# EAGLE board C64 ROM Selector - ATMega368 (EAGLE 9.6.1)
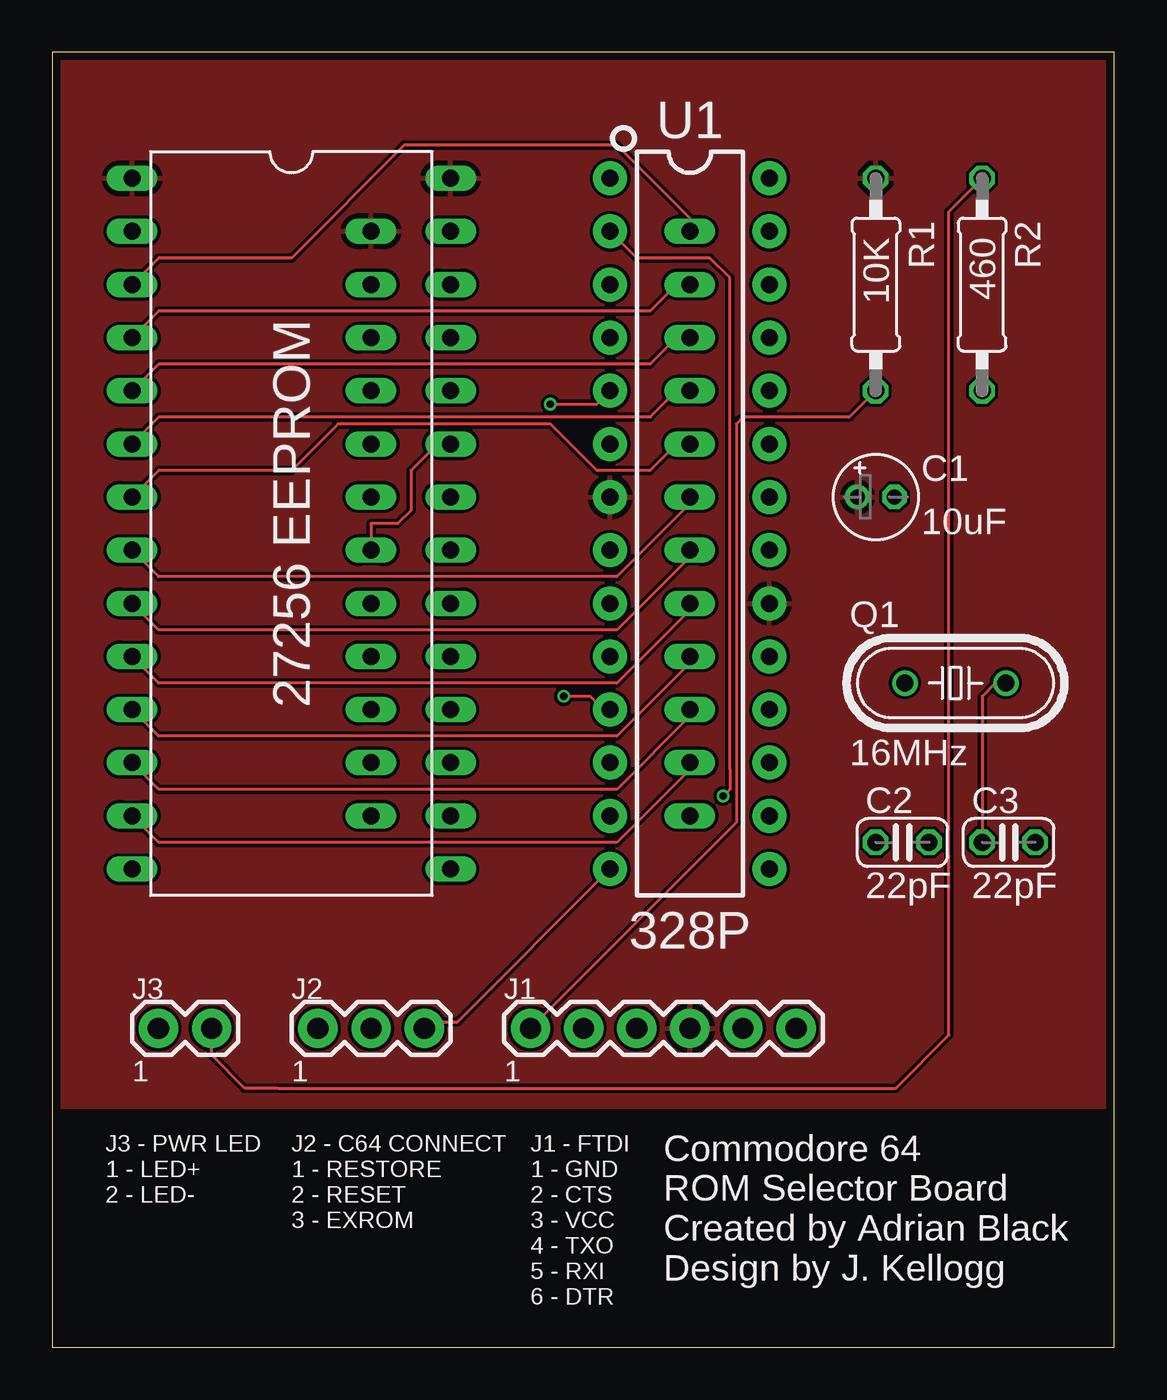
[diagram p0: board, top side]
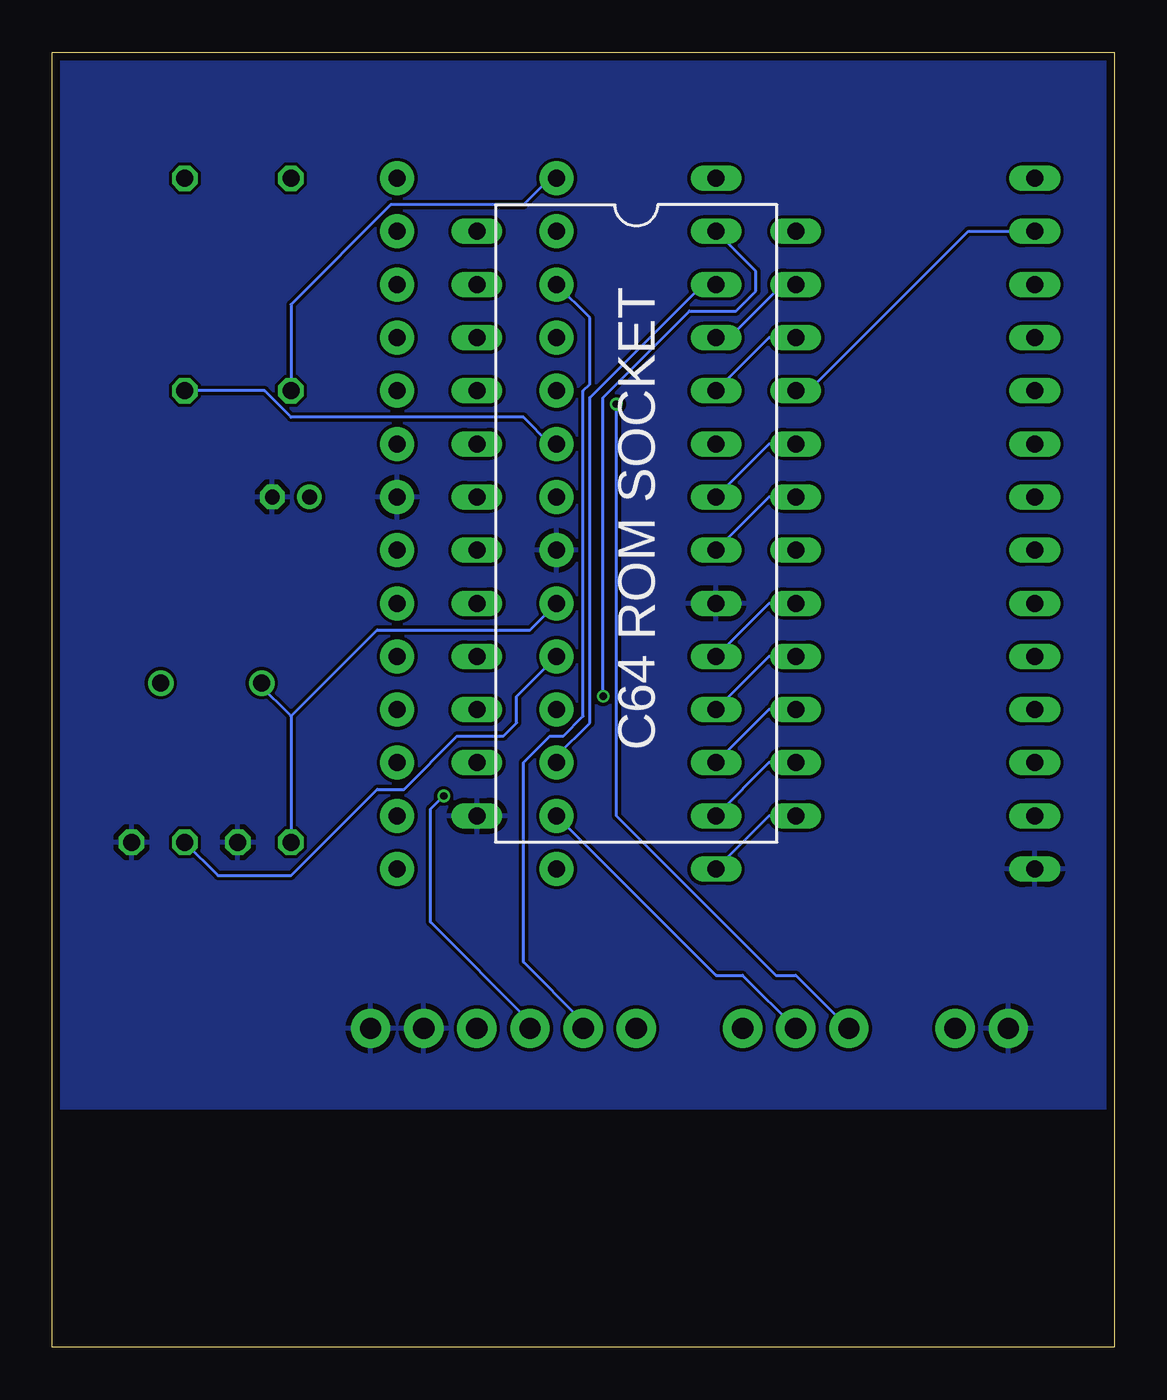
[diagram p1: board, bottom side, seen from below]

Size 50.78 x 61.9 mm. Coordinates in mm from the lower left corner, seen from the top.
Outline: 0,0 50.78,0 50.78,61.9 0,61.9 0,0
Copper layers (1*16): Top 0.035559375mm / dielectric 1.6mm / Bottom 0.035559375mm
Design rules "oshpark-2layer": minimum track width 6mil, minimum drill 10mil, track to track 6mil, track to pad 6mil, pad to pad 6mil, via to via 6mil, smd to smd 6mil, copper to edge 15mil, drill to drill 6mil, minimum pad ring 5mil, minimum via ring 5mil, stop-mask expansion 2.5mil, vias tented up to drill 0mil, thermal gap 10mil

## Footprints (pad centres in the part's own frame; a part is rotated, then mirrored left to right if it is on the bottom)
E1,8-4 = drill 0.711 pad 1.168: + -0.889,0 | drill 0.711 pad 1.168 octagon: - 0.889,0
C025-024X044 = drill 0.813 octagon: 1 -1.27,0; 2 1.27,0
DIL24 = drill 0.813 long: 1 -13.97,-7.62; 2 -11.43,-7.62; 3 -8.89,-7.62; 4 -6.35,-7.62; 5 -3.81,-7.62; 6 -1.27,-7.62; 7 1.27,-7.62; 8 3.81,-7.62; 9 6.35,-7.62; 10 8.89,-7.62; 11 11.43,-7.62; 12 13.97,-7.62; 13 13.97,7.62; 14 11.43,7.62; 15 8.89,7.62; 16 6.35,7.62; 17 3.81,7.62; 18 1.27,7.62; 19 -1.27,7.62; 20 -3.81,7.62; 21 -6.35,7.62; 22 -8.89,7.62; 23 -11.43,7.62; 24 -13.97,7.62
DIL28 = drill 0.813 long: 1 -16.51,-7.62; 2 -13.97,-7.62; 3 -11.43,-7.62; 4 -8.89,-7.62; 5 -6.35,-7.62; 6 -3.81,-7.62; 7 -1.27,-7.62; 8 1.27,-7.62; 9 3.81,-7.62; 10 6.35,-7.62; 11 8.89,-7.62; 12 11.43,-7.62; 13 13.97,-7.62; 14 16.51,-7.62; 15 16.51,7.62; 16 13.97,7.62; 17 11.43,7.62; 18 8.89,7.62; 19 6.35,7.62; 20 3.81,7.62; 21 1.27,7.62; 22 -1.27,7.62; 23 -3.81,7.62; 24 -6.35,7.62; 25 -8.89,7.62; 26 -11.43,7.62; 27 -13.97,7.62; 28 -16.51,7.62
1X06 = drill 1.016 pad 1.88: 1 0,0; 2 2.54,0; 3 5.08,0; 4 7.62,0; 5 10.16,0; 6 12.7,0
1X03 = drill 1.016 pad 1.88: 1 0,0; 2 2.54,0; 3 5.08,0
1X02 = drill 1.016 pad 1.88: 1 0,0; 2 2.54,0
HC49/S = drill 0.813: 1 -2.413,0; 2 2.413,0
0207/10 = drill 0.813 octagon: 1 -5.08,0; 2 5.08,0
DIP28 = drill 0.813 pad 1.626: 1 -16.51,-3.81; 2 -13.97,-3.81; 3 -11.43,-3.81; 4 -8.89,-3.81; 5 -6.35,-3.81; 6 -3.81,-3.81; 7 -1.27,-3.81; 8 1.27,-3.81; 9 3.81,-3.81; 10 6.35,-3.81; 11 8.89,-3.81; 12 11.43,-3.81; 13 13.97,-3.81; 14 16.51,-3.81; 15 16.51,3.81; 16 13.97,3.81; 17 11.43,3.81; 18 8.89,3.81; 19 6.35,3.81; 20 3.81,3.81; 21 1.27,3.81; 22 -1.27,3.81; 23 -3.81,3.81; 24 -6.35,3.81; 25 -8.89,3.81; 26 -11.43,3.81; 27 -13.97,3.81; 28 -16.51,3.81

## Placement (x,y rotation side)
C1  10uF  [E1,8-4]  39.37,40.64 0 top
C2  22pF  [C025-024X044]  40.64,24.13 0 top
C3  22pF  [C025-024X044]  45.72,24.13 0 top
IC1  C64 ROM SOCKET  [DIL24]  22.86,39.37 270 bottom
IC2  27256 EEPROM  [DIL28]  11.43,39.37 270 top
J1  FTDI Basic  [1X06]  22.86,15.24 0 top
J2  C64  [1X03]  12.7,15.24 0 top
J3  PLED  [1X02]  5.08,15.24 0 top
Q1  16MHz  [HC49/S]  43.18,31.75 0 top
R1  10K  [0207/10]  39.37,50.8 270 top
R2  460  [0207/10]  44.45,50.8 270 top
U1  328P  [DIP28]  30.48,39.37 270 top

## Library data of the parts
C1-C3 = rcl; SPICEPREFIX: C
IC1 IC2 = myparts
J1-J3 = SparkFun-Connectors
Q1 = crystal; OC_FARNELL: 1667008; OC_NEWARK: unknown
R1 R2 = rcl; SPICEPREFIX: R
U1 = SparkFun-IC-Microcontroller; PROD_ID: IC-09136

## Nets
!CE: IC1.20 IC2.22
!RESET: J1.1 R1.2 U1.1
A0: IC1.8 IC2.10
A1: IC1.7 IC2.9
A2: IC1.6 IC2.8
A3: IC1.5 IC2.7
A4: IC1.4 IC2.6
A5: IC1.3 IC2.5
A6: IC1.2 IC2.4
A7: IC1.1 IC2.3
A8: IC1.23 IC2.25
A9: IC1.22 IC2.24
A10: IC1.19 IC2.21
A11: IC1.18 IC2.23
A12: IC1.21 IC2.2
A13: IC2.26 U1.12
A14: IC2.27 U1.11
D0: IC1.9 IC2.11
D1: IC1.10 IC2.12
D2: IC1.11 IC2.13
D3: IC1.13 IC2.15
D4: IC1.14 IC2.16
D5: IC1.15 IC2.17
D6: IC1.16 IC2.18
D7: IC1.17 IC2.19
GND: C1.- C2.2 C3.2 IC1.12 IC2.14 IC2.20 J1.5 J1.6 J3.1 U1.8 U1.22
PIN3: J2.1 U1.5
PIN4: R2.2 U1.6
PIN7: J2.2 U1.13
PIN8: J2.3 U1.14
PIN9: C2.1 Q1.1 U1.9
PIN10: C3.1 Q1.2 U1.10
PLED+: J3.2 R2.1
RXI: J1.3 U1.2
TXO: J1.2 U1.3
VCC: C1.+ IC1.24 IC2.1 IC2.28 J1.4 R1.1 U1.7 U1.20

## Tracks (layer width: path | path; a pad name or v marks a point on that pad's centre or on a via)
!CE
  Bottom 0.152: IC2.22 16.51,43.18 IC1.20
!RESET
  Top 0.152: J1.1 32.7,25.08 32.7,44.13 33.02,44.45 38.1,44.45 R1.2
  Bottom 0.152: R1.2 39.37,49.85 34.61,54.61 28.26,54.61 26.99,55.88 U1.1
A0
  Top 0.152: IC2.10 5.08,31.75 26.99,31.75 30.48,35.24 IC1.8
A1
  Top 0.152: IC2.9 5.08,34.29 26.99,34.29 30.48,37.78 IC1.7
A2
  Top 0.152: IC2.8 5.08,36.83 26.99,36.83 30.48,40.32 IC1.6
A3
  Top 0.152: IC2.7 5.08,41.91 11.43,41.91 13.65,44.13 23.81,44.13 26.04,41.91 28.57,41.91 29.84,43.18 IC1.5
A4
  Top 0.152: IC2.6 5.08,44.45 28.57,44.45 29.84,45.72 IC1.4
A5
  Top 0.152: IC2.5 5.08,46.99 28.57,46.99 29.84,48.26 IC1.3
A6
  Top 0.152: IC2.4 5.08,49.53 28.57,49.53 29.84,50.8 IC1.2
A7
  Top 0.152: IC2.3 5.08,52.07 11.43,52.07 16.83,57.47 26.99,57.47 30.48,53.98 IC1.1
A8
  Bottom 0.152: IC2.25 18.41,48.26 15.88,50.8 IC1.23
A9
  Bottom 0.152: IC2.24 16.51,48.26 IC1.22
A10
  Bottom 0.152: IC2.21 16.51,40.64 IC1.19
A11
  Top 0.152: IC1.18 15.24,39.37 16.51,39.37 17.14,40.01 17.14,41.91 18.41,43.18 IC2.23
A12
  Bottom 0.152: IC2.2 6.99,53.34 14.61,45.72 IC1.21
A13
  Bottom 0.152: IC2.26 19.68,50.8 25.08,45.4 25.08,29.84 26.67,28.26 U1.12
A14  (via drill 0.35)
  Top 0.152: v24.45,31.11 25.72,31.11 26.35,30.48 U1.11
  Bottom 0.152: IC2.27 17.14,51.44 17.14,50.48 18.1,49.53 20.32,49.53 24.45,45.4 v24.45,31.11
D0
  Top 0.152: IC2.11 5.08,29.21 26.99,29.21 30.48,32.7 IC1.9
D1
  Top 0.152: IC2.12 5.08,26.67 26.99,26.67 30.48,30.16 IC1.10
D2
  Top 0.152: IC2.13 5.08,24.13 26.99,24.13 30.48,27.62 IC1.11
D3
  Bottom 0.152: IC2.15 16.51,25.4 IC1.13
D4
  Bottom 0.152: IC2.16 16.51,27.94 IC1.14
D5
  Bottom 0.152: IC2.17 16.51,30.48 IC1.15
D6
  Bottom 0.152: IC2.18 16.51,33.02 IC1.16
D7
  Bottom 0.152: IC2.19 16.51,35.56 IC1.17
GND
  pour Bottom: 0,62.23 50.8,62.23 50.8,11.43 0,11.43
PIN3  (via drill 0.35)
  Top 0.152: U1.5 26.04,45.09 v23.81,45.09
  Bottom 0.152: v23.81,45.09 23.81,25.4 17.62,19.21 17.46,19.05 16.19,17.78 15.24,17.78 J2.1
PIN4
  Bottom 0.152: R2.2 40.64,45.72 39.37,44.45 28.26,44.45 26.99,43.18 U1.6
PIN7
  Bottom 0.152: J2.2 17.78,17.78 19.05,17.78 U1.13
PIN8
  Top 0.152: U1.14 19.37,15.56 18.1,15.56 J2.3
PIN9
  Bottom 0.152: 39.37,30.16 C2.1 | 39.37,30.16 40.96,31.75 Q1.1 | U1.9 27.94,34.29 35.24,34.29 39.37,30.16
PIN10
  Top 0.152: C3.1 44.45,31.11 45.09,31.75 Q1.2
  Bottom 0.152: U1.10 28.57,31.11 28.57,29.84 29.21,29.21 31.43,29.21 33.97,26.67 35.24,26.67 39.37,22.54 42.86,22.54 C3.1
PLED+
  Top 0.152: R2.1 42.86,54.29 42.86,14.92 40.32,12.38 11.43,12.38 10.79,12.38 9.21,12.38 7.62,13.97 J3.2
RXI  (via drill 0.35)
  Top 0.152: U1.2 27.94,52.07 31.43,52.07 32.38,51.12 32.38,27.94 32.38,27.62 32.38,26.67 v32.07,26.35
  Bottom 0.152: v32.07,26.35 32.7,25.72 32.7,20.32 27.94,15.56 J1.3
TXO
  Bottom 0.152: U1.3 25.08,49.21 25.08,46.04 25.4,45.72 25.4,30.16 26.35,29.21 26.99,29.21 28.26,27.94 28.26,18.41 25.4,15.56 J1.2
VCC
  pour Top: 0,62.23 50.8,62.23 50.8,11.43 0,11.43

## Text on the board
tNames: 1 | 1 | 1 | J3 - PWR LED / 1 - LED+ / 2 - LED- | J2 - C64 CONNECT / 1 - RESTORE / 2 - RESET / 3 - EXROM | J1 - FTDI / 1 - GND / 2 - CTS / 3 - VCC / 4 - TXO / 5 - RXI / 6 - DTR | Commodore 64 / ROM Selector Board / Created by Adrian Black / Design by J. Kellogg